# EAGLE board InkTime_PCB (EAGLE 9.7.0)
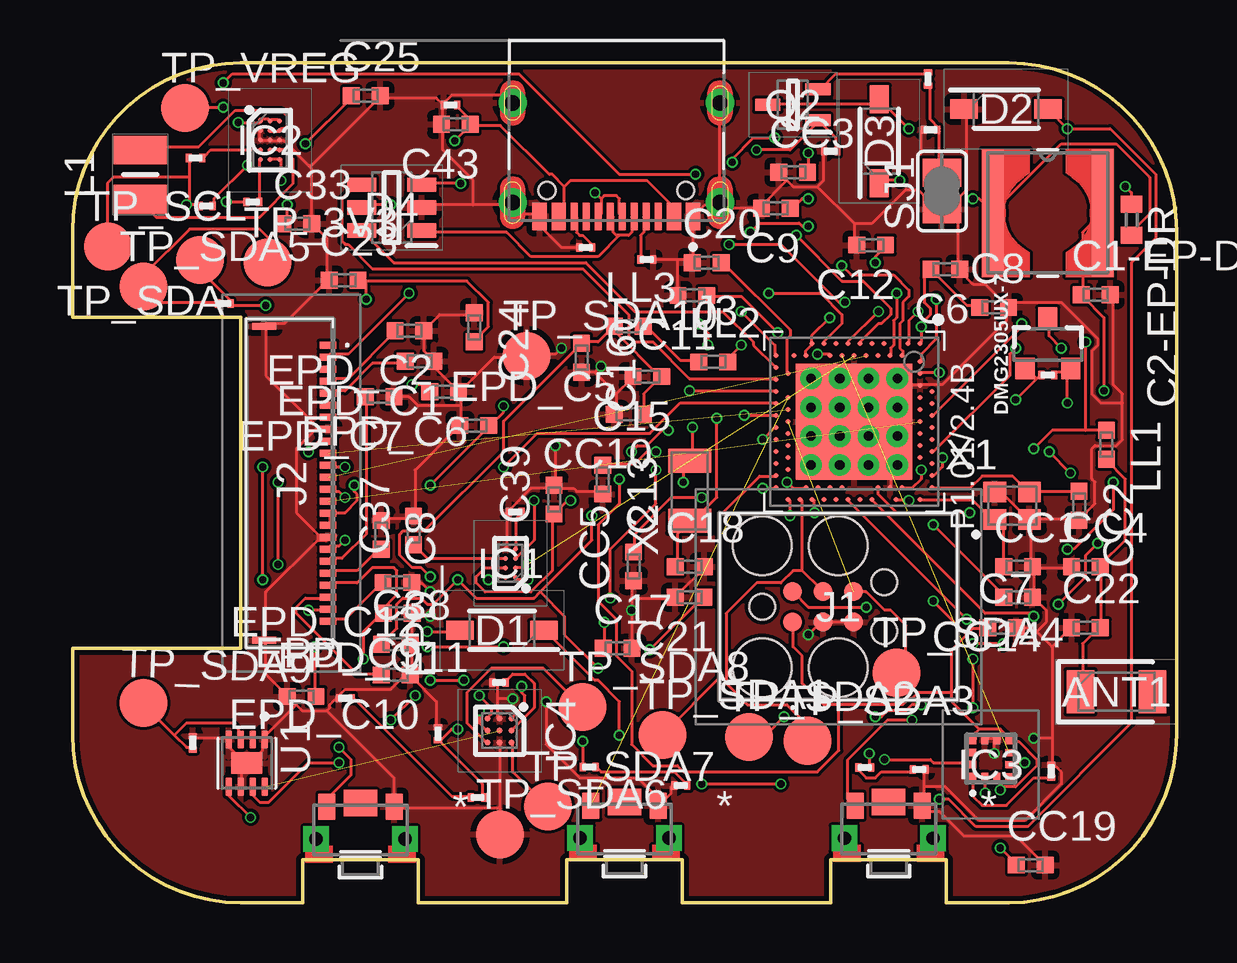
[diagram p0: board, top side]
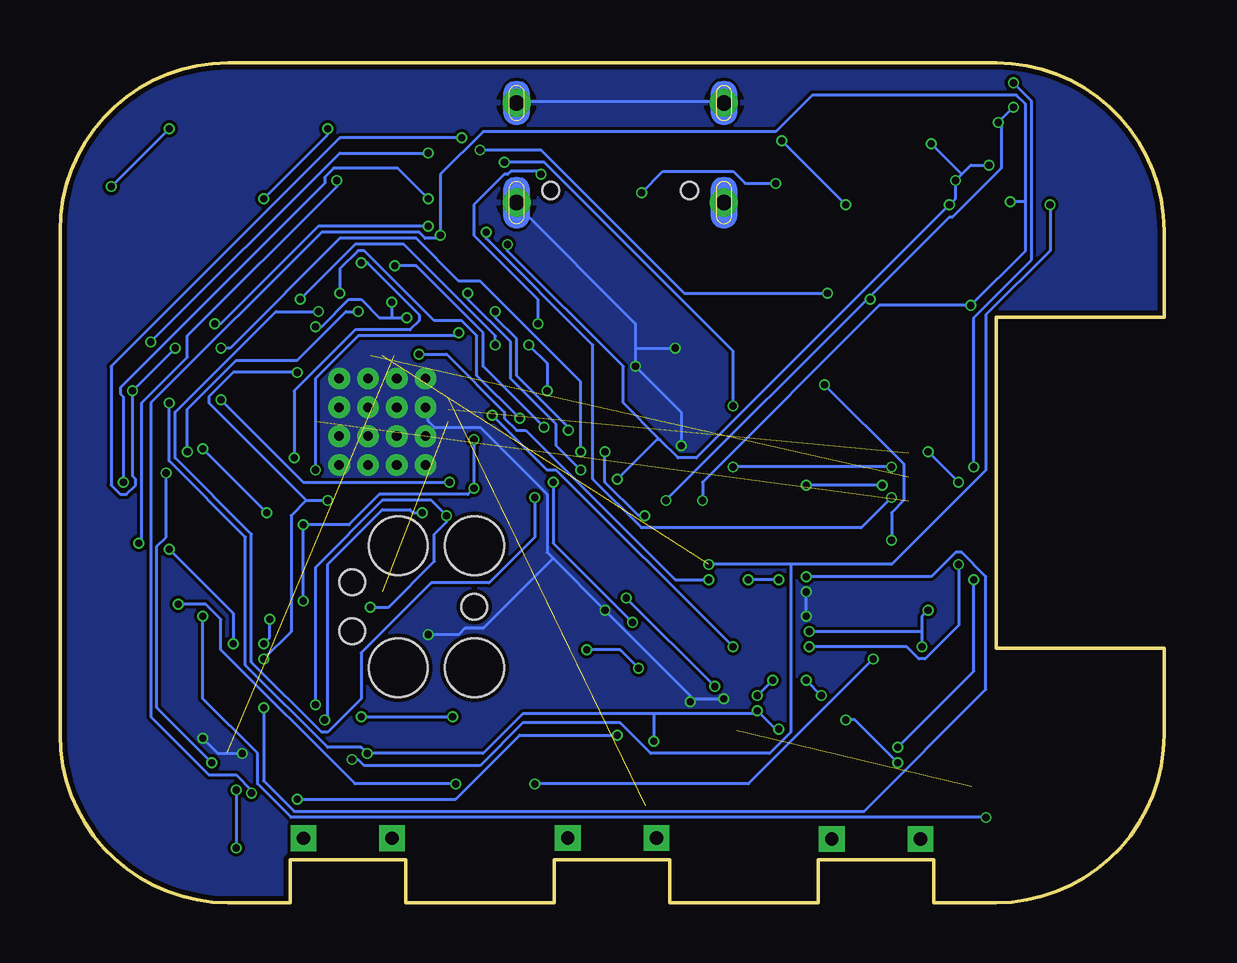
[diagram p1: board, bottom side, seen from below]

Size 46 x 35 mm. Coordinates in mm from the lower left corner, seen from the top.
Outline: 39,0 36.4,0 36.4,1.8 31.6,1.8 31.6,0 25.4,0 25.4,1.8 20.6,1.8 20.6,0 14.4,0 14.4,1.8 9.6,1.8 9.6,0 7,0 arc-90 0,7 0,10.6 7,10.6 7,24.4 0,24.4 0,28 arc-90 7,35 39,35 arc-90 46,28 46,7 arc-90 39,0
Copper layers (1*16): Top 0.035mm / dielectric 1.6mm / Bottom 0.035mm
Design rules "jlcpcb-2layers.dru": minimum track width 5mil, minimum drill 0.3mm, track to track 5mil, track to pad 5mil, pad to pad 5mil, via to via 5mil, smd to smd 5mil, copper to edge 0.2mm, drill to drill 6mil, minimum pad ring 10mil, minimum via ring 3mil, stop-mask expansion 4mil, vias tented up to drill 0mil, thermal gap 10mil

## Footprints (pad centres in the part's own frame; a part is rotated, then mirrored left to right if it is on the bottom)
2450AT18B100E_ANTC3216X140N = smd 1.15 x 1.8: 1 -1.5,0; 2 1.5,0
NORDIC_NRF_3_RESC0402_M = smd 0.7 x 0.7: 1 -0.6,0; 2 0.6,0
GRM011R60J152KE01L_1_0201 = smd 0.35 x 0.25: 1 0,0.275; 2 0,-0.275
ESP32_C6_LIBRARY_1_ESP32_WROVER_EAGLE-LTSPICE_C0402 = smd 0.7 x 0.9: 1 -0.65,0; 2 0.65,0
ESP32_C6_LIBRARY_5_SOD3716X135N = smd 1.15 x 0.8: 1 -1.75,0; 2 1.75,0
ESP32_C6_LIBRARY_3_SOT95P280X145-6N = smd 1.2 x 0.6: 1 -1.25,0.95; 2 -1.25,0; 3 -1.25,-0.95; 4 1.25,-0.95; 5 1.25,0; 6 1.25,0.95
ESP32_C6_LIBRARY_4_ESP32_C6_LIBRARY_4_ESP32_C6_LIBRARY_4_ESP32_C6_LIBRARY_4_ESP32_WROVER_SPARKFUN-DISCRETESEMI_SOT23-3 = smd 0.8 x 0.9: 1 -0.95,-1; 2 0.95,-1; 3 0,1.1
BQ25180YBGR_BGA8C40P2X4_100X155X50 = smd 0.2 x 0.2: A1 -0.2,0.6; A2 0.2,0.6; B1 -0.2,0.2; B2 0.2,0.2; C1 -0.2,-0.2; C2 0.2,-0.2; D1 -0.2,-0.6; D2 0.2,-0.6
RT6160AWSC_BGA15C40P3X5_140X230X60 = smd 0.216 x 0.216: A1 -0.4,0.8; A2 0,0.8; A3 0.4,0.8; B1 -0.4,0.4; B2 0,0.4; B3 0.4,0.4; C1 -0.4,0; C2 0,0; C3 0.4,0; D1 -0.4,-0.4; D2 0,-0.4; D3 0.4,-0.4; E1 -0.4,-0.8; E2 0,-0.8; E3 0.4,-0.8
BMA423_BMA423 = smd 0.3 x 0.35: 1 -0.75,-0.775; 2 -0.25,-0.775; 3 0.25,-0.775; 4 0.75,-0.775; 7 0.75,0.775; 8 0.25,0.775; 9 -0.25,0.775; 10 -0.75,0.775 | smd 0.35 x 0.3: 5 0.775,-0.25; 6 0.775,0.25; 11 -0.775,0.25; 12 -0.775,-0.25
DRV2605YZFR_BGA9C50P3X3_144X144X62 = smd 0.25 x 0.25: A1 -0.5,0.5; A2 0,0.5; A3 0.5,0.5; B1 -0.5,0; B2 0,0; B3 0.5,0; C1 -0.5,-0.5; C2 0,-0.5; C3 0.5,-0.5
TC2030-IDC_TC2030IDC = smd 0.783 x 0.783: 1 -0.953,-0.635; 2 -0.953,0.635; 3 0.317,-0.635; 4 0.317,0.635; 5 1.588,-0.635; 6 1.588,0.635 | hole 2.451: -2.223,-2.54; -2.223,2.54; 0.952,-2.54; 0.952,2.54 | hole 1.067: -2.223,0; 2.857,-1.016; 2.857,1.016
503480-2400_5034802400 = smd 0.3 x 0.7: 1 -5.75,1.525; 2 -5.25,1.525; 3 -4.75,1.525; 4 -4.25,1.525; 5 -3.75,1.525; 6 -3.25,1.525; 7 -2.75,1.525; 8 -2.25,1.525; 9 -1.75,1.525; 10 -1.25,1.525; 11 -0.75,1.525; 12 -0.25,1.525; 13 0.25,1.525; 14 0.75,1.525; 15 1.25,1.525; 16 1.75,1.525; 17 2.25,1.525; 18 2.75,1.525; 19 3.25,1.525; 20 3.75,1.525; 21 4.25,1.525; 22 4.75,1.525; 23 5.25,1.525; 24 5.75,1.525 | smd 0.3 x 1: MP1 -6.54,-1.125; MP2 6.54,-1.125
KH-TYPE-C-16P_KINGHELM_KH-TYPE-C-16P = smd 0.6 x 1.15: A1_B12 -3.2,4.725; A4_B9 -2.4,4.725; A9_B4 2.4,4.725; A12_B1 3.2,4.725 | smd 0.3 x 1.15: A5 -1.25,4.725; A6 -0.25,4.725; A7 0.25,4.725; A8 1.25,4.725; B5 1.75,4.725; B6 0.75,4.725; B7 -0.75,4.725; B8 -1.75,4.725 | drill 0.65 pad 1.05: SH1 -4.32,0; SH2 4.32,0; SH3 -4.32,4.15; SH4 4.32,4.15 | hole 0.7: -2.89,3.65; 2.89,3.65
MLP2016SR47MT0S1_INDC2016X100N = smd 1.2 x 2.2: 1 -1.028,0; 2 1.028,0
ESP32_C6_LIBRARY_2_IND_4828-WE-TPC_WRE = smd 0.9 x 5.3: 1 -2.286,0; 2 2.286,0
NORDIC_NRF_2_RESC0402_M = smd 0.7 x 0.7: 1 -0.6,0; 2 0.6,0
NORDIC_NRF_4_AQFN50P700X700X85_HS-74N = smd 4.85 x 4.85: P$74 0,0 | drill 0.4 pad 0.6: P$75 -1.8,1.8; P$76 -0.6,1.8; P$77 0.6,1.8; P$78 1.8,1.8; P$79 -1.8,0.6; P$80 -0.6,0.6; P$81 0.6,0.6; P$82 1.8,0.6; P$83 -1.8,-0.6; P$84 -0.6,-0.6; P$85 0.6,-0.6; P$86 1.8,-0.6; P$87 -1.8,-1.8; P$88 -0.6,-1.8; P$89 0.6,-1.8; P$90 1.8,-1.8 | smd 0.2 x 0.2: P$A8 -1.25,3.25; P$A10 -0.75,3.25; P$A12 -0.25,3.25; P$A14 0.25,3.25; P$A16 0.75,3.25; P$A18 1.25,3.25; P$A20 1.75,3.25; P$A22 2.25,3.25; P$A23 2.75,3.25; P$AA24 3.25,-2.25; P$AB2 -2.75,-2.5; P$AC5 -2,-2.75; P$AC9 -1,-2.75; P$AC11 -0.5,-2.75; P$AC13 0,-2.75; P$AC15 0.5,-2.75; P$AC17 1,-2.75; P$AC19 1.5,-2.75; P$AC21 2,-2.75; P$AC24 3.25,-2.75; P$AD2 -2.75,-3.25; P$AD4 -2.25,-3.25; P$AD6 -1.75,-3.25; P$AD8 -1.25,-3.25; P$AD10 -0.75,-3.25; P$AD12 -0.25,-3.25; P$AD14 0.25,-3.25; P$AD16 0.75,-3.25; P$AD18 1.25,-3.25; P$AD20 1.75,-3.25; P$AD22 2.25,-3.25; P$AD23 2.75,-3.25; P$B1 -3.25,2.75; P$B3 -2.5,2.75; P$B5 -2,2.75; P$B7 -1.5,2.75; P$B9 -1,2.75; P$B11 -0.5,2.75; P$B13 0,2.75; P$B15 0.5,2.75; P$B17 1,2.75; P$B19 1.5,2.75; P$B24 3.25,2.75; P$C1 -3.25,2.25; P$D2 -2.75,2; P$D23 2.75,2; P$E24 3.25,1.75; P$F2 -2.75,1.5; P$F23 2.75,1.5; P$G1 -3.25,1.25; P$H2 -2.75,1; P$H23 2.75,1; P$J1 -3.25,0.75; P$J24 3.25,0.75; P$K2 -2.75,0.5; P$L1 -3.25,0.25; P$L24 3.25,0.25; P$M2 -2.75,0; P$N1 -3.25,-0.25; P$N24 3.25,-0.25; P$P2 -2.75,-0.5; P$P23 2.75,-0.5; P$R1 -3.25,-0.75; P$R24 3.25,-0.75; P$T2 -2.75,-1; P$T23 2.75,-1; P$U1 -3.25,-1.25; P$U24 3.25,-1.25; P$V23 2.75,-1.5; P$W1 -3.25,-1.75; P$W24 3.25,-1.75; P$Y2 -2.75,-2; P$Y23 2.75,-2
ESP32_C6_LIBRARY_6_SOT65P210X110-3N = smd 1.05 x 0.5: 1 -1.05,0.65; 2 -1.05,-0.65; 3 1.05,0
CPF0201D7K68C1_0201 = smd 0.35 x 0.25: 1 0,0.275; 2 0,-0.275
ESP32_C6_LIBRARY_7_JUMPER_SJ = smd 1.168 x 1.6: 1 -0.762,0; 2 0.762,0
2025-10-22_07-23-44_LIBRARY_SW_EVP-AKE31A_PAN = smd 0.711 x 1.092: 1 -1.4,-0.972; 2 1.4,-0.972 | drill 0.559 pad 0.914 square: 3 -1.848,0.381; 4 1.848,0.381 | smd 1.397 x 1.092: 5 0,-1.124
HECTOR_WATCH_1_TP20R = smd 2 x 2: TP 0,0
ESP32_C6_LIBRARY_SON50P200X200X80-9N = smd 0.76 x 0.27: 1 -0.985,0.75; 2 -0.985,0.25; 3 -0.985,-0.25; 4 -0.985,-0.75; 5 0.985,-0.75; 6 0.985,-0.25; 7 0.985,0.25; 8 0.985,0.75 | smd 0.9 x 1.3: 9 0,0
NORDIC_NRF_BT-XTAL_2016_N = smd 0.95 x 0.85: 1 -0.725,-0.575; 2 0.725,-0.575; 3 0.725,0.575; 4 -0.725,0.575
NORDIC_NRF_1_XTAL_3215_N = smd 1 x 1.8: 1 -1.25,0; 2 1.25,0

## Placement (x,y rotation side)
ANT1  2450AT18B100E_2450AT18B100E  [2450AT18B100E_ANTC3216X140N]  43.5,8.79 0 top
C1-EP-DR  10uF  [NORDIC_NRF_3_RESC0402_M]  42.63,25.34 0 top
C2  GRM011R60J152KE01L_1_GRM011R60J152KE01L  [GRM011R60J152KE01L_1_0201]  5.01,6.66 0 top
C2-EP-DR  4.7uF/25V  [ESP32_C6_LIBRARY_1_ESP32_WROVER_EAGLE-LTSPICE_C0402]  44.13,28.46 270 top
C3  1uF  [GRM011R60J152KE01L_1_0201]  17.77,9.18 90 top
C4  0.1uF  [GRM011R60J152KE01L_1_0201]  15.23,7.04 0 top
C5  GRM011R60J152KE01L_1_GRM011R60J152KE01L  [GRM011R60J152KE01L_1_0201]  11.37,8.52 90 top
C6  4.7uF  [NORDIC_NRF_3_RESC0402_M]  36.37,26.4 180 top
C7  100nF  [NORDIC_NRF_3_RESC0402_M]  38.73,11.47 0 top
C8  100nF  [NORDIC_NRF_3_RESC0402_M]  38.4,24.81 0 top
C9  820pF  [NORDIC_NRF_3_RESC0402_M]  29.31,28.94 180 top
C10  GRM011R60J152KE01L_1_GRM011R60J152KE01L  [GRM011R60J152KE01L_1_0201]  35.28,5.55 270 top
C11  GRM011R60J152KE01L_1_GRM011R60J152KE01L  [GRM011R60J152KE01L_1_0201]  25.34,4.89 90 top
C12  100pF  [NORDIC_NRF_3_RESC0402_M]  33.28,27.41 180 top
C13  N.C  [NORDIC_NRF_3_RESC0402_M]  22.09,17.63 270 top
C15  1uF  [NORDIC_NRF_3_RESC0402_M]  23.95,21.93 180 top
C16  47nF  [NORDIC_NRF_3_RESC0402_M]  21.21,22.71 270 top
C17  12pF  [NORDIC_NRF_3_RESC0402_M]  22.71,10.61 0 top
C18  12pF  [NORDIC_NRF_3_RESC0402_M]  25.72,14.01 0 top
C20  4.7uF  [NORDIC_NRF_3_RESC0402_M]  26.43,26.68 0 top
C21  4.7uF  [NORDIC_NRF_3_RESC0402_M]  25.71,12.74 180 top
C22  N.C  [NORDIC_NRF_3_RESC0402_M]  42.23,11.47 0 top
C23  0.1uF  [NORDIC_NRF_3_RESC0402_M]  11.3,25.95 0 top
C24  10uF  [NORDIC_NRF_3_RESC0402_M]  16.74,23.98 270 top
C25  22uF  [NORDIC_NRF_3_RESC0402_M]  12.22,33.63 0 top
C33  22uF  [NORDIC_NRF_3_RESC0402_M]  9.36,28.3 0 top
C37  1uF  [NORDIC_NRF_3_RESC0402_M]  14.21,15.52 90 top
C38  1uF  [NORDIC_NRF_3_RESC0402_M]  13.48,10.78 0 top
C39  10uF  [NORDIC_NRF_3_RESC0402_M]  20.06,16.8 90 top
C42  GRM011R60J152KE01L_1_GRM011R60J152KE01L  [GRM011R60J152KE01L_1_0201]  15.75,33.25 90 top
C43  4.7uF  [NORDIC_NRF_3_RESC0402_M]  15.97,32.44 180 top
CC1  12pF  [NORDIC_NRF_3_RESC0402_M]  39.4,14.01 0 top
CC2  12pF  [NORDIC_NRF_3_RESC0402_M]  41.94,16.55 270 top
CC3  1pF  [NORDIC_NRF_3_RESC0402_M]  30.03,30.45 0 top
CC4  1pF  [NORDIC_NRF_3_RESC0402_M]  42.23,14.01 0 top
CC5  100nF  [NORDIC_NRF_3_RESC0402_M]  23.38,14.02 90 top
CC10  N.C  [NORDIC_NRF_3_RESC0402_M]  23.18,20.36 180 top
CC11  100pF  [NORDIC_NRF_3_RESC0402_M]  25.83,25.31 180 top
CC14  4.7uF  [NORDIC_NRF_3_RESC0402_M]  39.4,12.74 180 top
CC19  100nF  [NORDIC_NRF_3_RESC0402_M]  39.93,1.57 0 top
D1  ESP32_C6_LIBRARY_5_MBR0530  [ESP32_C6_LIBRARY_5_SOD3716X135N]  17.89,11.35 180 top
D2  ESP32_C6_LIBRARY_5_MBR0530  [ESP32_C6_LIBRARY_5_SOD3716X135N]  38.9,33.08 0 top
D3  ESP32_C6_LIBRARY_5_MBR0530  [ESP32_C6_LIBRARY_5_SOD3716X135N]  33.62,31.73 90 top
D4  ESP32_C6_LIBRARY_3_USBLC6-2SC6Y  [ESP32_C6_LIBRARY_3_SOT95P280X145-6N]  13.29,28.97 180 top
DMG2305UX-7  20V/4.2A/52mΩ/1.4W  [ESP32_C6_LIBRARY_4_ESP32_C6_LIBRARY_4_ESP32_C6_LIBRARY_4_ESP32_C6_LIBRARY_4_ESP32_WROVER_SPARKFUN-DISCRETESEMI_SOT23-3]  40.64,23.27 0 top
EPD_C1  1uF/50V  [NORDIC_NRF_3_RESC0402_M]  14.46,22.57 180 top
EPD_C2  1uF/50V  [NORDIC_NRF_3_RESC0402_M]  14.04,23.84 180 top
EPD_C5  0.1uF/50V  [NORDIC_NRF_3_RESC0402_M]  16.74,19.89 0 top
EPD_C6  1uF/50V  [NORDIC_NRF_3_RESC0402_M]  15.48,21.3 180 top
EPD_C7  1uF/50V  [NORDIC_NRF_3_RESC0402_M]  12.79,21.09 180 top
EPD_C8  1uF/50V  [NORDIC_NRF_3_RESC0402_M]  12.86,15.33 270 top
EPD_C9  1uF/50V  [NORDIC_NRF_3_RESC0402_M]  13.55,12.07 180 top
EPD_C10  1uF/50V  [NORDIC_NRF_3_RESC0402_M]  13.47,9.49 180 top
EPD_C11  1uF/50V  [NORDIC_NRF_3_RESC0402_M]  9.54,8.6 0 top
EPD_C12  1uF/50V  [NORDIC_NRF_3_RESC0402_M]  13.54,13.35 180 top
IC1  BQ25180YBGR_BQ25180YBGR  [BQ25180YBGR_BGA8C40P2X4_100X155X50]  18.25,14.15 180 top
IC2  RT6160AWSC_RT6160AWSC  [RT6160AWSC_BGA15C40P3X5_140X230X60]  8.22,31.78 0 top
IC3  BMA423_BMA423  [BMA423_BMA423]  38.26,6.01 359.8 top
IC4  DRV2605YZFR_DRV2605YZFR  [DRV2605YZFR_BGA9C50P3X3_144X144X62]  17.8,7.17 270 top
J1  TC2030-IDC_TC2030-IDC  [TC2030-IDC_TC2030IDC]  30.96,12.34 0 top
J2  503480-2400_503480-2400  [503480-2400_5034802400]  9.12,17.49 270 top
J3  KH-TYPE-C-16P_KH-TYPE-C-16P  [KH-TYPE-C-16P_KINGHELM_KH-TYPE-C-16P]  22.66,33.33 180 top
L1  MLP2016SR47MT0S1_FTC252012SR47MBCA  [MLP2016SR47MT0S1_INDC2016X100N]  2.82,30.34 270 top
L5  ESP32_C6_LIBRARY_2_744043680IND_4828-WE-TPC_WRE  [ESP32_C6_LIBRARY_2_IND_4828-WE-TPC_WRE]  40.64,28.75 0 top
LL1  3.9nH  [NORDIC_NRF_2_RESC0402_M]  43.08,19.09 270 top
LL2  10uH  [NORDIC_NRF_2_RESC0402_M]  26.7,22.54 0 top
LL3  15uH  [NORDIC_NRF_2_RESC0402_M]  23.18,24.02 0 top
P1.01/2.4B  NORDIC_NRF_4_NRF52840_QF  [NORDIC_NRF_4_AQFN50P700X700X85_HS-74N]  32.57,20.05 270 top
Q2  ESP32_C6_LIBRARY_6_SI1308EDL-T1-GE3  [ESP32_C6_LIBRARY_6_SOT65P210X110-3N]  30.01,33.25 180 top
R1_EP_DR  CPF0201D7K68C1_CPF0201D7K68C1  [CPF0201D7K68C1_0201]  35.65,34.32 180 top
R2  CPF0201D7K68C1_CPF0201D7K68C1  [CPF0201D7K68C1_0201]  5.12,31.04 90 top
R2_EP_DR  CPF0201D7K68C1_CPF0201D7K68C1  [CPF0201D7K68C1_0201]  31.59,31.32 90 top
R3  CPF0201D7K68C1_CPF0201D7K68C1  [CPF0201D7K68C1_0201]  7.51,29.2 90 top
R4  CPF0201D7K68C1_CPF0201D7K68C1  [CPF0201D7K68C1_0201]  5.58,29.04 90 top
R5  CPF0201D7K68C1_CPF0201D7K68C1  [CPF0201D7K68C1_0201]  6.32,24.97 270 top
R8  CPF0201D7K68C1_CPF0201D7K68C1  [CPF0201D7K68C1_0201]  40.78,5.48 180 top
R9  10K  [CPF0201D7K68C1_0201]  18.45,16.29 90 top
R11  CPF0201D7K68C1_CPF0201D7K68C1  [CPF0201D7K68C1_0201]  16.88,4.38 90 top
R12  CPF0201D7K68C1_CPF0201D7K68C1  [CPF0201D7K68C1_0201]  33.01,5.64 90 top
R13  CPF0201D7K68C1_CPF0201D7K68C1  [CPF0201D7K68C1_0201]  21.53,5.65 270 top
R14  CPF0201D7K68C1_CPF0201D7K68C1  [CPF0201D7K68C1_0201]  23.93,26.8 90 top
R15  CPF0201D7K68C1_CPF0201D7K68C1  [CPF0201D7K68C1_0201]  21.39,27.31 90 top
R_PWR_EPD  CPF0201D7K68C1_CPF0201D7K68C1  [CPF0201D7K68C1_0201]  40.64,22 90 top
R_TYPE_SEL  CPF0201D7K68C1_CPF0201D7K68C1  [CPF0201D7K68C1_0201]  35.75,32.21 90 top
SJ1  0  [ESP32_C6_LIBRARY_7_JUMPER_SJ]  36.22,29.66 90 top
SW1  2025-10-22_07-23-44_LIBRARY_EVP-AKE31ASW_EVP-AKE31A_PAN  [2025-10-22_07-23-44_LIBRARY_SW_EVP-AKE31A_PAN]  12,3.03 180 top
SW2  2025-10-22_07-23-44_LIBRARY_EVP-AKE31ASW_EVP-AKE31A_PAN  [2025-10-22_07-23-44_LIBRARY_SW_EVP-AKE31A_PAN]  23,3.08 180 top
SW3  2025-10-22_07-23-44_LIBRARY_EVP-AKE31ASW_EVP-AKE31A_PAN  [2025-10-22_07-23-44_LIBRARY_SW_EVP-AKE31A_PAN]  34.01,3.07 180 top
TP_3V3  HECTOR_WATCH_1_TPTP20R  [HECTOR_WATCH_1_TP20R]  8.12,26.68 0 top
TP_SCL  HECTOR_WATCH_1_TPTP20R  [HECTOR_WATCH_1_TP20R]  1.48,27.35 0 top
TP_SDA  HECTOR_WATCH_1_TPTP20R  [HECTOR_WATCH_1_TP20R]  5.31,26.78 180 top
TP_SDA1  HECTOR_WATCH_1_TPTP20R  [HECTOR_WATCH_1_TP20R]  24.59,7 0 top
TP_SDA2  HECTOR_WATCH_1_TPTP20R  [HECTOR_WATCH_1_TP20R]  28.19,6.92 0 top
TP_SDA3  HECTOR_WATCH_1_TPTP20R  [HECTOR_WATCH_1_TP20R]  30.62,6.75 0 top
TP_SDA4  HECTOR_WATCH_1_TPTP20R  [HECTOR_WATCH_1_TP20R]  34.33,9.59 0 top
TP_SDA5  HECTOR_WATCH_1_TPTP20R  [HECTOR_WATCH_1_TP20R]  2.96,25.68 0 top
TP_SDA6  HECTOR_WATCH_1_TPTP20R  [HECTOR_WATCH_1_TP20R]  17.8,2.85 0 top
TP_SDA7  HECTOR_WATCH_1_TPTP20R  [HECTOR_WATCH_1_TP20R]  19.81,4.01 0 top
TP_SDA8  HECTOR_WATCH_1_TPTP20R  [HECTOR_WATCH_1_TP20R]  21.24,8.17 0 top
TP_SDA9  HECTOR_WATCH_1_TPTP20R  [HECTOR_WATCH_1_TP20R]  2.96,8.33 358.1 top
TP_SDA10  HECTOR_WATCH_1_TPTP20R  [HECTOR_WATCH_1_TP20R]  18.92,22.79 0 top
TP_VREG  HECTOR_WATCH_1_TPTP20R  [HECTOR_WATCH_1_TP20R]  4.69,33.12 0 top
U1  ESP32_C6_LIBRARY_MAX17048G+T10  [ESP32_C6_LIBRARY_SON50P200X200X80-9N]  7.26,5.82 270 top
X1  32MHz  [NORDIC_NRF_BT-XTAL_2016_N]  39.15,16.55 0 top
X2  32.768KHz  [NORDIC_NRF_1_XTAL_3215_N]  25.72,17.17 90 top

## Library data of the parts
ANT1 = InkTime_v5; ARROW_PART_NUMBER: 2450AT18B100E; ARROW_PRICE-STOCK: https://www.arrow.com/en/products/2450at18b100e/johanson-dielectrics?utm_currency=USD&region=nac; DESCRIPTION: Antennas 2.45GHz ANTENNA; HEIGHT: 1.4mm; MANUFACTURER_NAME: JOHANSON TECHNOLOGY; MANUFACTURER_PART_NUMBER: 2450AT18B100E; MOUSER_PART_NUMBER: 609-2450AT18B100E; MOUSER_PRICE-STOCK: https://www.mouser.co.uk/ProductDetail/Johanson-Technology/2450AT18B100E?qs=yCnrNFeXz%252Bh5MFsFIXGZGA%3D%3D
C1-EP-DR C2-C13 C15-C18 C20-C25 C33 C37-C39 C42 C43 CC1-CC5 CC10 CC11 CC14 CC19 EPD_C1 EPD_C2 EPD_C5-EPD_C12 LL1-LL3 P1.01/2.4B R1_EP_DR R2 R2_EP_DR R3-R5 R8 R9 R11-R15 R_PWR_EPD R_TYPE_SEL SJ1 TP_3V3 TP_SCL TP_SDA TP_SDA1-TP_SDA10 TP_VREG X1 X2 = InkTime_v5
C2-EP-DR = InkTime_v5; SPICEMODEL: NONE; SPICEPREFIX: C
D1-D3 = InkTime_v5; AVAILABILITY: In Stock; CHECK_PRICES: https://www.snapeda.com/parts/MBR0530/Onsemi/view-part/?ref=eda; DESCRIPTION: Diode Schottky 30 V 500mA Surface Mount SOD-123; MF: ON Semiconductor; MP: MBR0530; PACKAGE: SOD-123-2 ON Semiconductor; PRICE: None; PURCHASE-URL: https://www.snapeda.com/api/url_track_click_mouser/?unipart_id=179458&manufacturer=ON Semiconductor&part_name=MBR0530&search_term=None; SNAPEDA_LINK: https://www.snapeda.com/parts/MBR0530/Onsemi/view-part/?ref=snap
D4 = InkTime_v5; AVAILABILITY: In Stock; CHECK_PRICES: https://www.snapeda.com/parts/USBLC6-2SC6Y/STMicroelectronics/view-part/?ref=eda; DESCRIPTION: 17V Clamp 5A (8/20µs) Ipp Tvs Diode Surface Mount SOT-23-6; MF: STMicroelectronics; MP: USBLC6-2SC6Y; PACKAGE: SOT-23-6 STMicroelectronics; PRICE: None; SNAPEDA_LINK: https://www.snapeda.com/parts/USBLC6-2SC6Y/STMicroelectronics/view-part/?ref=snap
DMG2305UX-7 = InkTime_v5; PROD_ID: TRAN-14388
IC1 = InkTime_v5; ARROW_PART_NUMBER: BQ25180YBGR; ARROW_PRICE-STOCK: https://www.arrow.com/en/products/bq25180ybgr/texas-instruments?utm_currency=USD&region=nac; DESCRIPTION: Charger IC Lithium Ion/Polymer, Lithium Iron Phosphate 8-DSBGA (1.6x1.1); HEIGHT: 0.5mm; MANUFACTURER_NAME: Texas Instruments; MANUFACTURER_PART_NUMBER: BQ25180YBGR; MOUSER_PART_NUMBER: 595-BQ25180YBGR; MOUSER_PRICE-STOCK: https://www.mouser.co.uk/ProductDetail/Texas-Instruments/BQ25180YBGR?qs=doiCPypUmgEWjAK%252BJAX6Tw%3D%3D
IC2 = InkTime_v5; DESCRIPTION: Buck-Boost Regulator Positive Output Step-Up/Step-Down I2C DC-DC Controller IC 15-WL-CSP (BSC) (1.4x2.3); HEIGHT: 0.6mm; MANUFACTURER_NAME: RICHTEK; MANUFACTURER_PART_NUMBER: RT6160AWSC; MOUSER_PART_NUMBER: 835-RT6160AWSC; MOUSER_PRICE-STOCK: https://www.mouser.co.uk/ProductDetail/Richtek/RT6160AWSC?qs=amGC7iS6iy%2FLd9PSoixZXQ%3D%3D
IC3 = InkTime_v5; ARROW_PART_NUMBER: BMA423; ARROW_PRICE-STOCK: https://www.arrow.com/en/products/bma423/bosch; DESCRIPTION: Accelerometers Triaxial low-g 12bit Acceleration Sensor; HEIGHT: 1mm; MANUFACTURER_NAME: BOSCH; MANUFACTURER_PART_NUMBER: BMA423; MOUSER_PART_NUMBER: 262-BMA423; MOUSER_PRICE-STOCK: https://www.mouser.co.uk/ProductDetail/Bosch-Sensortec/BMA423?qs=HXFqYaX1Q2xC%252BSgeGoX3mg%3D%3D
IC4 = InkTime_v5; ARROW_PART_NUMBER: DRV2605YZFR; ARROW_PRICE-STOCK: https://www.arrow.com/en/products/drv2605yzfr/texas-instruments?region=nac; DESCRIPTION: Haptic Driver for ERM/LRA with Built-In Library and Smart Loop Architecture; HEIGHT: 0.625mm; MANUFACTURER_NAME: Texas Instruments; MANUFACTURER_PART_NUMBER: DRV2605YZFR
J1 = InkTime_v5; DESCRIPTION: CABLE ADAPTER 6 POS; HEIGHT: 19mm; MANUFACTURER_NAME: Tag Connect; MANUFACTURER_PART_NUMBER: TC2030-IDC
J2 = InkTime_v5; DESCRIPTION: FFC & FPC Connectors 0.5mm FPC RA SMT Dual Contact 24Ckt; HEIGHT: 1.87mm; MANUFACTURER_NAME: Molex; MANUFACTURER_PART_NUMBER: 503480-2400; MOUSER_PART_NUMBER: 538-503480-2400; MOUSER_PRICE-STOCK: https://www.mouser.co.uk/ProductDetail/Molex/503480-2400?qs=OAhjpuo3Vu7efIoxFh9AOw%3D%3D
J3 = InkTime_v5; AVAILABILITY: Not in stock; CHECK_PRICES: https://www.snapeda.com/parts/KH-TYPE-C-16P/Kinghelm/view-part/?ref=eda; MF: kinghelm; MP: KH-TYPE-C-16P; PACKAGE: None; PRICE: None; SNAPEDA_LINK: https://www.snapeda.com/parts/KH-TYPE-C-16P/Kinghelm/view-part/?ref=snap
L1 = InkTime_v5; DESCRIPTION: SMD / SMT Inductors (Coils), L=0.47?H, L x W x T :; HEIGHT: 1mm; JLCPCB: https://jlcpcb.com/partdetail/6763488-FTC252012SR47MBCA/C5832368; MANUFACTURER_NAME: TDK; MANUFACTURER_PART_NUMBER: FTC252012SR47MBCA
L5 = InkTime_v5; COPYRIGHT: Copyright (C) 2024 Ultra Librarian. All rights reserved.; MANUFACTURER_PART_NUMBER: 744043680; MFR_NAME: Wurth Electronics
Q2 = InkTime_v5; AVAILABILITY: In Stock; CHECK_PRICES: https://www.snapeda.com/parts/SI1308EDL-T1-GE3/Vishay+Siliconix/view-part/?ref=eda; DESCRIPTION: Si1308EDL-T1-GE3 N-channel MOSFET Transistor, 1.5 A, 30 V, 3-Pin SC-70 | Siliconix / Vishay SI1308EDL-T1-GE3; MF: Vishay Siliconix; MP: SI1308EDL-T1-GE3; PACKAGE: SOT-323 Vishay Semiconductor; PRICE: None; PURCHASE-URL: https://www.snapeda.com/api/url_track_click_mouser/?unipart_id=274603&manufacturer=Vishay Siliconix&part_name=SI1308EDL-T1-GE3&search_term=None; SNAPEDA_LINK: https://www.snapeda.com/parts/SI1308EDL-T1-GE3/Vishay+Siliconix/view-part/?ref=snap
SW1-SW3 = InkTime_v5; COPYRIGHT: Copyright (C) 2025 Ultra Librarian. All rights reserved.; DIGI-KEY_PART_NUMBER_1: P123437TR-ND; DIGI-KEY_PART_NUMBER_2: P123437CT-ND; DIGI-KEY_PART_NUMBER_3: P123437DKR-ND; MANUFACTURER_NAME: Panasonic; MANUFACTURER_PART_NUMBER: EVP-AKE31A
U1 = InkTime_v5; AVAILABILITY: In Stock; CHECK_PRICES: https://www.snapeda.com/parts/MAX17048G+T10/Analog+Devices/view-part/?ref=eda; DESCRIPTION: 3µA 1-Cell/2-Cell Fuel Gauge with ModelGauge; MF: Analog Devices; MP: MAX17048G+T10; PACKAGE: TDFN-8 Maxim; PRICE: None; PURCHASE-URL: https://www.snapeda.com/api/url_track_click_mouser/?unipart_id=329239&manufacturer=Analog Devices&part_name=MAX17048G+T10&search_term=None; SNAPEDA_LINK: https://www.snapeda.com/parts/MAX17048G+T10/Analog+Devices/view-part/?ref=snap

## Nets
3V3/1.7D: C4.2 DMG2305UX-7.2 IC4.C2 R11.2 R12.2 R13.2 R_PWR_EPD.2
3V3/2.4A: C6.2 C7.1 C8.1 C25.1 C33.1 CC14.2 CC19.1 IC2.E2 IC2.E3 IC3.3 IC3.7 IC3.10 J1.1 P1.01/2.4B.P$AD14 P1.01/2.4B.P$AD23 P1.01/2.4B.P$B1 P1.01/2.4B.P$W1 P1.01/2.4B.P$Y2 R4.2 R5.2 TP_3V3.TP TP_SDA5.TP
ALERT: P1.01/2.4B.P$J24 U1.5
D+: D4.4 P1.01/2.4B.P$AD6
D-: D4.6 P1.01/2.4B.P$AD4
DN: D4.1 J3.A7 J3.B7
DP: D4.3 J3.A6 J3.B6
EPD_3V3: C1-EP-DR.1 DMG2305UX-7.3 EPD_C5.2 J2.15 J2.16 L5.2
EPD_BUSY: J2.9 P1.01/2.4B.P$AD12
EPD_CS: J2.12 P1.01/2.4B.P$K2
EPD_DC: J2.11 P1.01/2.4B.P$AD10
EPD_RST: J2.10 P1.01/2.4B.P$AC11
GDR: J2.2 Q2.1 R2_EP_DR.2
GND: C1-EP-DR.2 C2.1 C3.1 C4.1 C5.1 C6.1 C7.2 C8.2 C9.2 C10.1 C11.1 C12.2 C13.2 C15.2 C16.2 C17.2 C18.2 C20.1 C21.2 C22.1 C23.1 C24.1 C25.2 C33.2 C37.2 C38.2 C39.2 C42.1 C43.2 CC1.2 CC2.2 CC3.1 CC4.1 CC5.1 CC10.2 CC11.2 CC14.1 CC19.2 D2.1 D4.2 EPD_C1.1 EPD_C2.1 EPD_C5.1 EPD_C6.1 EPD_C7.1 EPD_C8.1 EPD_C9.1 EPD_C10.1 EPD_C11.1 EPD_C12.1 IC1.D2 IC2.B1 IC2.C1 IC2.C2 IC2.C3 IC3.8 IC3.9 IC4.B1 IC4.B3 J1.3 J1.5 J2.8 J2.17 J2.MP1 J2.MP2 J3.A1_B12 J3.A12_B1 J3.SH1 J3.SH2 J3.SH3 J3.SH4 P1.01/2.4B.P$74 P1.01/2.4B.P$75 P1.01/2.4B.P$76 P1.01/2.4B.P$77 P1.01/2.4B.P$78 P1.01/2.4B.P$79 P1.01/2.4B.P$80 P1.01/2.4B.P$81 P1.01/2.4B.P$82 P1.01/2.4B.P$83 P1.01/2.4B.P$84 P1.01/2.4B.P$85 P1.01/2.4B.P$86 P1.01/2.4B.P$87 P1.01/2.4B.P$88 P1.01/2.4B.P$89 P1.01/2.4B.P$90 P1.01/2.4B.P$B7 P1.01/2.4B.P$F23 R2_EP_DR.1 R8.2 R9.1 R14.2 R15.1 R_TYPE_SEL.1 SJ1.1 SW1.1 SW2.1 SW3.1 TP_SDA6.TP TP_SDA10.TP U1.1 U1.4 U1.6 U1.9 X1.2 X1.4
HAPTIC_EN: IC4.A1 P1.01/2.4B.P$U1
IMU_INT1: IC3.5 P1.01/2.4B.P$N1
IMU_INT2: IC3.6 P1.01/2.4B.P$P2
LX1: IC2.B2 IC2.B3 L1.1
LX2: IC2.D2 IC2.D3 L1.2
MOSI: J2.14 P1.01/2.4B.P$B13
N$1: IC1.D1 R9.2
N$2: C9.1 P1.01/2.4B.P$N24
N$3: CC3.2 LL1.1 P1.01/2.4B.P$H23
N$4: IC2.D1 R2.2
N$5: IC2.E1 R3.2
N$6: C20.2 P1.01/2.4B.P$AC5
N$7: ANT1.1 C22.2 CC4.2 LL1.2
N$8: CC1.1 P1.01/2.4B.P$B24 X1.1
N$9: CC2.1 P1.01/2.4B.P$A23 X1.3
N$10: CC11.1 P1.01/2.4B.P$D23
N$11: C18.1 P1.01/2.4B.P$F2 X2.1
N$12: C12.1 P1.01/2.4B.P$A22
N$13: C13.1 P1.01/2.4B.P$A18
N$14: LL2.1 LL3.2
N$15: LL2.2 P1.01/2.4B.P$B3
N$17: C15.1 C16.1 CC10.1 LL3.1 P1.01/2.4B.P$B5 P1.01/2.4B.P$E24
N$18: C17.1 P1.01/2.4B.P$D2 X2.2
N$19: IC3.1 R8.1
N$20: CC5.2 P1.01/2.4B.P$C1
N$21: C2-EP-DR.1 D1.1 D2.2
N$22: Q2.2 R1_EP_DR.2
N$23: R1_EP_DR.1 R_TYPE_SEL.2 SJ1.2
N$24: C2-EP-DR.2 D3.2 L5.1 Q2.3
N$25: EPD_C2.2 J2.4
N$26: EPD_C1.2 J2.5
N$27: J3.B5 R15.2
N$28: EPD_C7.2 J2.19
N$29: C5.2 R11.1
N$30: EPD_C12.2 J2.24
N$31: EPD_C6.2 J2.18
N$32: EPD_C8.2 J2.20
N$33: C10.2 R12.1
N$34: EPD_C10.2 J2.22
N$35: C11.2 R13.1
N$36: J3.A5 R14.1
N$37: C3.2 IC4.A2
OUT+: IC4.A3 TP_SDA7.TP
OUT-: IC4.C3 TP_SDA8.TP
P0.04: P1.01/2.4B.P$J1
P0.09: P1.01/2.4B.P$L24
P0.13: P1.01/2.4B.P$AD8 SW1.2
P0.14: P1.01/2.4B.P$AC9 SW2.2
P0.19: P1.01/2.4B.P$AC15
P0.20: P1.01/2.4B.P$AD16
P0.21: P1.01/2.4B.P$AC17
P0.22: P1.01/2.4B.P$AD18
P0.23: P1.01/2.4B.P$AC19
P0.24: P1.01/2.4B.P$AD20
P0.25: P1.01/2.4B.P$AC21
P0.26: P1.01/2.4B.P$G1
P0.27: P1.01/2.4B.P$H2
P0.28: P1.01/2.4B.P$B11
P0.29: P1.01/2.4B.P$A10
P0.30: P1.01/2.4B.P$B9
P0.31: P1.01/2.4B.P$A8
P1.01: DMG2305UX-7.1 P1.01/2.4B.P$Y23 R_PWR_EPD.1
P1.02: P1.01/2.4B.P$W24 SW3.2
P1.03: P1.01/2.4B.P$V23
P1.04: P1.01/2.4B.P$U24
P1.05: P1.01/2.4B.P$T23
P1.06: P1.01/2.4B.P$R24
P1.07: P1.01/2.4B.P$P23
P1.09: P1.01/2.4B.P$R1
P1.10: P1.01/2.4B.P$A20
P1.11: P1.01/2.4B.P$B19
P1.12: P1.01/2.4B.P$B17
P1.13: P1.01/2.4B.P$A16
P1.14: P1.01/2.4B.P$B15
P1.15: P1.01/2.4B.P$A14
PMIC_INT: IC1.A1 P1.01/2.4B.P$T2
PREVGH: D3.1 EPD_C9.2 J2.21
PREVGL: D1.2 EPD_C11.2 J2.23
RESE: J2.3
RESET: J1.6 P1.01/2.4B.P$AC13 TP_SDA4.TP
SCK: J2.13 P1.01/2.4B.P$A12
SCL/1.4C: IC4.C1 U1.7
SCL/2.4C: IC1.B1 IC3.12 P1.01/2.4B.P$M2 R2.1 R4.1 TP_SCL.TP
SDA/1.4C: IC4.B2 U1.8
SDA/2.4C: IC1.C1 IC3.2 P1.01/2.4B.P$L1 R3.1 R5.1 TP_SDA.TP
SWDCLK: J1.4 P1.01/2.4B.P$AA24 TP_SDA3.TP
SWDIO: J1.2 P1.01/2.4B.P$AC24 TP_SDA2.TP
SWO: P1.01/2.4B.P$AD22 TP_SDA1.TP
VBAT/1.2A: C2.2 TP_SDA9.TP U1.2 U1.3
VBAT/2.5C: C37.1 IC1.C2
VBUS/1.5D: C42.2 C43.1 D4.5 J3.A4_B9 J3.A9_B4
VBUS/2.6D: C21.1 C38.1 IC1.A2 P1.01/2.4B.P$AD2
VREG: C23.2 C24.2 C39.1 IC1.B2 IC2.A1 IC2.A2 IC2.A3 TP_VREG.TP

## Tracks (layer width: path | path; a pad name or v marks a point on that pad's centre or on a via)
3V3/1.7D  (via drill 0.3)
  Top 0.127: 41.45,22.1 40.94,22.1 R_PWR_EPD.2 | 41.45,22.1 41.58,22.23 DMG2305UX-7.2 41.45,22.1 | v16.94,8 16.94,7.49 17.2,7.24 IC4.C2 | v16.05,7.24 15.8,7.24 15.29,6.73 | 15.29,6.73 17.07,4.95 17.07,4.45 R11.2 | 15.29,6.73 C4.2 | v33.2,6.22 33.2,5.72 R12.2 | v21.26,6.73 21.26,5.72 R13.2 | v41.45,20.83 41.45,22.1
  Bottom 0.127: 16.81,7.87 16.18,7.24 v16.05,7.24 | 16.81,7.87 21.26,7.87 | 21.26,7.87 26.72,7.87 28.37,6.22 v33.2,6.22 33.45,6.48 34.85,6.48 38.28,9.91 38.28,15.24 41.45,18.42 v41.45,20.83 | 16.81,7.87 v16.94,8 | 21.26,7.87 v21.26,6.73
3V3/2.4A  (via drill 0.3)
  Top 0.127: v28.75,17.27 29.26,17.27 P1.01/2.4B.P$AD23 | v28.75,19.3 29.26,19.81 P1.01/2.4B.P$AD14 | v35.86,15.75 38.79,12.83 CC14.2 | 38.79,4.83 38.53,5.08 38.53,5.21 IC3.3 | 38.79,4.83 39.29,4.83 40.18,5.72 40.18,5.97 39.42,6.73 39.04,6.73 IC3.7 39.04,6.86 38.66,7.24 37.77,7.24 | 37.77,7.24 37.52,6.99 37.52,6.86 IC3.10 | 37.26,11.18 36.63,10.54 36.63,8.76 | 37.26,11.18 37.52,11.43 38.02,11.43 C7.1 | 36.63,8.76 36.63,8.38 37.77,7.24 | v38.66,2.29 39.29,1.65 CC19.1 | 38.79,4.83 v38.66,4.7 | 31.93,8.26 34.59,8.26 34.85,8.51 34.98,8.51 35.23,8.76 36.63,8.76 | 31.93,8.26 31.29,8.26 30.4,9.14 30.4,10.29 30.02,10.67 30.02,11.68 J1.1 | 37.26,11.18 v35.86,12.57 | P1.01/2.4B.P$Y2 30.53,22.86 30.53,22.99 30.78,23.24 P1.01/2.4B.P$W1 30.78,23.37 30.78,23.62 v31.55,24.38 | P1.01/2.4B.P$B1 35.36,23.37 v35.36,24 35.36,24.13 35.74,24.51 35.74,24.77 35.48,25.02 35.48,26.04 35.74,26.29 C6.2 35.86,26.29 37.26,24.89 37.77,24.89 C8.1 | R5.2 6.02,25.02 3.61,25.02 2.97,25.65 TP_SDA5.TP 2.97,25.78 2.97,26.16 4.88,28.07 7.8,28.07 8.18,27.69 | IC2.E2 8.31,30.99 8.56,30.99 IC2.E3 8.69,30.99 v8.69,30.1 | v8.94,29.08 8.94,28.45 8.81,28.32 C33.1 8.69,28.19 8.18,27.69 | v7.29,30.73 5.89,29.34 5.89,29.08 R4.2 | v9.7,31.62 11.61,33.53 C25.1 | 8.18,27.69 8.18,26.8 TP_3V3.TP | v32.18,25.02 31.93,25.02 29.51,27.43 v27.36,27.43 | 31.93,8.26 31.93,6.35 31.04,5.46 25.45,5.46 25.2,5.72 24.18,5.72 23.29,6.6 23.29,9.65 22.66,10.29 22.66,11.81 21.89,12.57 21.89,15.75 22.78,16.64 v22.78,17.65
  Bottom 0.127: v28.75,19.3 v28.75,17.27 29.01,17.02 32.69,17.02 33.96,15.75 v35.86,15.75 v35.86,12.57 | v38.66,4.7 v38.66,2.29 | 32.18,24.38 32.69,24.38 33.45,25.15 33.96,25.15 35.1,24 v35.36,24 | 32.18,24.38 v31.55,24.38 | v7.29,30.73 8.05,30.73 8.43,30.35 | 8.43,30.35 v8.69,30.1 8.69,29.34 v8.94,29.08 19.48,18.54 20.24,18.54 21.01,19.3 | 8.43,30.35 v9.7,31.62 | v32.18,25.02 32.18,24.38 | v27.36,27.43 27.36,27.18 22.53,22.35 22.53,20.83 21.01,19.3 | v22.78,17.65 21.13,19.3 21.01,19.3
ALERT  (via drill 0.3)
  Top 0.127: v40.06,11.94 39.93,12.07 38.02,12.07 33.32,16.76 P1.01/2.4B.P$J24 | v7.42,3.56 6.53,4.45 6.53,4.83 U1.5
  Bottom 0.127: v40.06,11.94 40.06,8.51 37.77,6.22 37.77,4.95 36.37,3.56 v7.42,3.56
D+
  Top 0.127: P1.01/2.4B.P$AD6 29.26,21.84 25.7,21.84 24.18,23.37 23.42,23.37 23.16,23.62 23.16,24.51 21.26,26.42 12.5,26.42 11.48,27.43 11.35,27.43 11.23,27.56 11.23,29.34 11.73,29.85 11.99,29.85 D4.4
D-
  Top 0.127: P1.01/2.4B.P$AD4 29.26,22.35 28.37,23.24 28.37,23.37 27.1,24.64 23.42,24.64 21.39,26.67 13.39,26.67 12.12,27.94 D4.6
DN
  Top 0.127: 22.78,27.81 23.16,27.81 23.29,27.94 23.29,28.58 J3.B7 | 22.78,27.81 22.66,27.81 22.53,27.94 22.53,28.58 J3.A7 | 22.78,27.81 21.89,26.92 19.1,26.92 18.08,27.94 14.66,27.94 D4.1
DP  (via drill 0.3)
  Top 0.127: 22.02,29.34 22.02,28.7 J3.B6 | 22.02,29.34 22.15,29.46 22.66,29.46 22.78,29.34 22.78,28.7 J3.A6 | v16.18,29.97 14.66,29.97 D4.3 | 22.02,29.34 v21.77,29.59
  Bottom 0.127: v16.18,29.97 17.45,29.97 17.96,30.48 20.88,30.48 v21.77,29.59
EPD_3V3  (via drill 0.3)
  Top 0.127: L5.2 42.85,28.7 42.09,27.94 42.09,25.4 C1-EP-DR.1 42.09,25.27 42.98,24.38 v42.98,21.34 | v41.2,23.11 40.69,23.62 40.69,24.26 DMG2305UX-7.3 | J2.16 10.72,15.75 10.72,16.13 J2.15 10.72,16.26 11.35,16.26 11.86,16.76 11.86,17.02 11.73,17.15 v11.73,17.4 | v14.91,17.4 17.32,19.81 EPD_C5.2 17.45,19.94 17.96,20.45 v17.96,20.7 | v29.26,31.88 28.37,31.88 27.48,30.99 v27.48,30.86
  Bottom 0.127: v41.2,23.11 v42.98,21.34 42.98,17.78 42.85,17.65 42.85,17.4 43.23,17.02 43.48,17.02 43.87,17.4 43.87,22.35 34.34,31.88 v29.26,31.88 | v11.73,17.4 v14.91,17.4 | v27.48,30.86 25.83,30.86 17.96,22.99 v17.96,20.7
EPD_BUSY  (via drill 0.3)
  Top 0.127: v27.99,20.32 29.26,20.32 P1.01/2.4B.P$AD12 | v14.78,10.67 v17.96,10.67 | v8.56,17.53 v8.56,14.1 | v9.83,18.8 10.21,19.18 10.59,19.18 J2.9
  Bottom 0.127: v27.99,20.32 25.7,18.03 25.32,18.03 v17.96,10.67 | v14.78,10.67 10.72,10.67 10.21,10.16 9.96,10.16 8.56,11.56 v8.56,14.1 | v9.83,18.8 v8.56,17.53
EPD_CS  (1 unrouted)
EPD_DC  (via drill 0.3)
  Top 0.127: v17.96,18.16 19.35,19.56 24.05,19.56 25.32,20.83 29.26,20.83 P1.01/2.4B.P$AD10 | v11.35,18.16 10.72,18.16 J2.11
  Bottom 0.127: v11.35,18.16 v17.96,18.16
EPD_RST  (1 unrouted)
GDR  (via drill 0.3)
  Top 0.127: R2_EP_DR.2 31.8,31.37 31.8,31.88 31.17,32.51 Q2.1 31.04,32.51 29.9,31.37 v28.5,31.37 | v14.02,25.4 11.48,22.86 10.72,22.86 J2.2
  Bottom 0.127: v14.02,25.4 19.99,25.4 25.96,31.37 v28.5,31.37
GND  (via drill 0.3)
  Top 0.127: 17.83,3.94 17.83,2.92 TP_SDA6.TP | 17.83,3.94 17.83,6.6 IC4.B3 | 17.83,3.94 13.51,3.94 SW1.1 13.39,4.06 13.39,5.21 10.59,8 | 10.21,15.11 10.59,15.11 J2.17 | 10.21,15.11 8.05,12.95 8.05,11.05 J2.MP2 8.05,10.92 8.05,9.53 8.94,8.64 EPD_C11.1 9.07,8.51 9.32,8.26 | C4.1 15.16,7.37 15.16,8.38 14.15,9.4 EPD_C10.1 | EPD_C10.1 14.15,9.53 14.15,10.67 C38.2 14.15,10.8 14.15,11.94 | 14.15,11.94 EPD_C9.1 14.15,11.94 | v14.91,12.95 14.53,13.34 EPD_C12.1 | 14.15,11.94 v14.91,11.94 | 10.59,8 10.72,8.13 10.72,8.26 10.97,8.51 C5.1 11.1,8.64 11.35,8.89 13.26,8.89 13.77,9.4 14.02,9.4 EPD_C10.1 | 10.59,8 9.58,8 9.32,8.26 | C2.1 5.13,6.86 6.4,6.86 U1.4 6.53,6.73 6.53,6.48 7.16,5.84 U1.9 | U1.6 7.04,4.95 7.04,5.59 7.16,5.72 U1.9 | U1.9 7.29,5.72 7.92,6.35 7.92,6.73 U1.1 7.92,6.86 9.32,8.26 | C42.1 15.42,33.15 15.42,32.51 C43.2 15.42,32.39 15.42,31.37 16.69,30.1 16.69,29.08 | C42.1 15.42,33.27 15.16,33.53 12.88,33.53 C25.2 12.75,33.53 9.96,30.73 9.83,30.73 | C42.1 15.54,33.27 15.54,33.4 15.8,33.66 17.96,33.66 18.21,33.4 J3.SH2 | R15.1 20.37,27.31 19.48,28.19 19.48,28.58 J3.A12_B1 19.35,28.7 18.72,28.7 18.34,29.08 J3.SH4 18.21,29.08 16.69,29.08 | 16.69,29.08 14.66,29.08 D4.2 | 10.21,19.81 10.59,19.81 J2.8 | 10.21,19.81 8.05,21.97 8.05,24 J2.MP1 8.05,24.13 8.81,24.13 10.59,25.91 C23.1 10.59,26.04 10.59,27.69 10.08,28.19 C33.2 9.96,28.32 9.96,30.61 9.83,30.73 | IC2.B1 7.8,32.13 7.8,31.88 IC2.C1 7.92,31.75 8.18,31.75 IC2.C2 8.31,31.75 8.56,31.75 IC2.C3 8.69,31.75 8.81,31.75 9.83,30.73 | 10.21,15.11 10.21,15.37 9.32,16.26 9.32,18.92 10.21,19.81 | 34.34,18.16 34.09,17.91 34.09,17.27 P1.01/2.4B.P$F23
  Top 0.127: 34.47,21.84 34.72,21.59 35.23,21.59 P1.01/2.4B.P$B7 35.36,21.59 36.25,21.59 38.91,24.26 38.91,24.77 C8.2 | 33.07,18.29 32.05,18.29 P1.01/2.4B.P$86 | 33.07,18.29 P1.01/2.4B.P$82 | 33.07,18.29 P1.01/2.4B.P$74 | 34.34,18.16 P1.01/2.4B.P$78 | 34.34,18.16 P1.01/2.4B.P$74 | P1.01/2.4B.P$85 32.05,19.43 32.69,19.43 P1.01/2.4B.P$74 | P1.01/2.4B.P$84 32.05,20.57 32.56,20.07 P1.01/2.4B.P$74 | 31.93,21.84 30.78,21.84 | 31.93,21.84 P1.01/2.4B.P$83 | 31.93,21.84 P1.01/2.4B.P$74 | P1.01/2.4B.P$81 33.2,19.43 P1.01/2.4B.P$74 | P1.01/2.4B.P$80 33.2,20.7 P1.01/2.4B.P$74 | P1.01/2.4B.P$77 34.34,19.43 33.71,18.8 P1.01/2.4B.P$74 | 33.83,21.21 34.34,20.7 P1.01/2.4B.P$76 | 33.83,21.21 33.2,21.84 P1.01/2.4B.P$79 | 33.83,21.21 P1.01/2.4B.P$74 | 34.47,21.84 P1.01/2.4B.P$75 | 34.47,21.84 P1.01/2.4B.P$74 | C18.2 26.34,13.97 25.2,12.83 C21.2 25.07,12.7 23.29,12.7 | 23.29,12.7 23.29,13.34 CC5.1 | 23.29,12.7 v23.29,12.19 23.29,10.67 C17.2 | 24.56,4.19 24.43,4.06 SW2.1 24.56,4.19 | 24.56,4.19 24.94,4.57 24.94,4.83 C11.1 | J1.5 32.44,11.68 31.29,11.68 J1.3 31.17,11.68 v30.66,11.18 | 17.7,8.51 17.7,9.02 17.58,9.14 C3.1 | 17.7,8.51 17.7,7.75 IC4.B1 | v18.34,8.51 17.7,8.51 | 24.56,4.19 23.55,5.21 21.13,5.21 19.74,6.6 v19.74,8.38 | P1.01/2.4B.P$90 30.78,18.29 30.78,19.43 P1.01/2.4B.P$89 | 30.78,21.84 30.78,20.7 P1.01/2.4B.P$88 | 30.78,21.84 P1.01/2.4B.P$87 | 35.48,4.83 35.48,4.06 SW3.1 35.48,3.94 35.61,3.81 36.12,3.81 37.13,2.79 39.29,2.79 40.44,1.65 CC19.2 | 35.48,4.83 35.48,5.46 C10.1 | IC3.9 38.02,6.86 38.4,6.86 IC3.8 38.4,6.73 v38.4,6.22 | 40.82,10.67 40.82,6.86 | 40.82,6.86 40.82,5.84 | 40.82,10.67 41.58,11.43 C22.1 | 40.82,6.86 v40.06,6.86
  Top 0.127: 40.82,10.67 40.18,11.3 | 40.18,11.3 40.06,11.43 39.42,11.43 C7.2 | 40.06,13.97 40.06,12.83 CC14.1 40.06,12.7 40.56,12.19 40.56,11.68 40.18,11.3 | 40.06,13.97 41.58,13.97 CC4.1 | 40.06,13.97 CC1.2 39.93,14.1 39.93,15.88 X1.2 | X1.2 39.93,16 41.83,16 CC2.2 41.96,16 42.6,16.64 42.6,17.53 42.47,17.65 42.47,18.92 42.6,19.05 43.48,19.05 43.74,19.3 43.74,20.83 | 43.74,20.83 43.74,21.21 43.36,21.59 43.36,25.27 C1-EP-DR.2 | X1.4 38.53,17.02 38.79,17.02 39.8,16 X1.2 | 35.48,4.83 36.37,4.83 37.77,3.43 39.67,3.43 41.2,4.95 41.2,5.46 40.82,5.84 | 40.82,5.84 R8.2 | C24.1 16.69,24.51 15.29,24.51 14.66,23.88 EPD_C2.1 14.66,23.75 14.66,22.99 15.04,22.61 EPD_C1.1 15.16,22.48 15.16,22.23 16.05,21.34 EPD_C6.1 | EPD_C8.1 12.88,16 14.15,16 C37.2 14.27,16.13 14.27,18.03 16.05,19.81 EPD_C5.1 16.18,19.94 16.18,20.7 | 16.18,20.7 16.18,21.21 EPD_C6.1 | 16.18,20.7 14.4,20.7 14.02,21.08 13.51,21.08 EPD_C7.1 | EPD_C6.1 16.18,21.34 17.58,22.73 18.85,22.73 TP_SDA10.TP 18.97,22.86 20.12,22.86 v20.37,23.11 | C8.2 38.91,24.89 38.02,25.78 37.52,25.78 37.01,26.29 C6.1 36.88,26.42 36.88,28.58 36.5,28.96 | 35.23,29.72 35.23,31.12 35.36,31.24 35.36,32.13 R_TYPE_SEL.1 | 35.23,29.72 36.12,28.83 SJ1.1 | 36.5,28.96 37.26,29.72 37.26,33.02 D2.1 | 36.5,28.96 36.25,28.96 SJ1.1 | 36.5,28.96 SJ1.1 | 31.04,29.85 31.29,30.1 31.29,31.24 R2_EP_DR.1 | 31.04,29.85 30.02,29.85 29.77,30.1 | 29.77,30.1 29.51,30.35 CC3.1 29.77,30.1 | 32.56,28.32 32.56,27.43 C12.2 | 31.04,29.85 32.56,28.32 | IC1.D2 18.08,14.73 18.08,16.26 R9.1 18.21,16.38 19.1,17.27 19.99,17.27 C39.2 | C13.2 22.02,17.15 21.01,17.15 20.88,17.27 20.12,17.27 C39.2
  Top 0.127: 22.66,21.21 22.66,20.45 CC10.2 | 22.66,21.21 23.29,21.84 C15.2 | 21.77,22.1 21.26,22.1 C16.2 | 22.66,21.21 21.77,22.1 | 25.2,26.8 25.7,26.8 C20.1 25.83,26.8 25.83,28.58 J3.A1_B12 25.96,28.7 26.34,29.08 26.97,29.08 J3.SH3 | 25.2,26.8 24.31,26.8 R14.2 | 25.2,26.8 25.2,25.4 CC11.2 | 28.63,28.96 27.23,28.96 27.1,29.08 J3.SH3 | v22.02,22.35 21.77,22.1 | J3.SH1 26.97,33.27 26.97,29.21 J3.SH3 | v20.12,19.05 20.12,17.4 C39.2 | 28.63,28.96 29.77,30.1 | 28.63,28.96 C9.2 | 35.23,29.72 34.72,29.72 33.32,28.32 32.56,28.32 | 43.74,20.83 42.85,20.83 42.47,21.21 42.47,22.99 42.72,23.24 42.72,23.5 41.2,25.02 39.17,25.02 39.04,24.89 C8.2
  Bottom 0.127: v14.91,11.94 v14.91,12.95 | 19.61,8.51 v18.34,8.51 | 25.45,14.35 25.7,14.61 25.7,17.02 28.5,19.81 30.4,19.81 | 25.45,14.35 v23.29,12.19 19.61,8.51 | 30.4,19.81 30.66,19.56 P1.01/2.4B.P$89 | v30.66,11.18 29.39,11.18 29.13,11.43 28.37,11.43 25.45,14.35 | 19.61,8.51 v19.74,8.38 | 30.4,19.81 30.66,20.07 30.66,20.57 P1.01/2.4B.P$88 | v38.4,6.22 39.42,6.22 v40.06,6.86 | 22.02,23.11 22.02,24.13 26.97,29.08 J3.SH3 | 22.02,23.11 v22.02,22.35 20.12,20.45 v20.12,19.05 | 22.02,23.11 v20.37,23.11 | J3.SH2 18.34,33.4 26.97,33.4 J3.SH1
  pour Top: -3.22,-1.12 48.03,-1.12 48.03,36.93 -3.22,36.73
  pour Bottom: -3.72,-1.42 48.73,-1.42 48.73,37.43 -3.72,36.93
HAPTIC_EN  (via drill 0.3)
  Top 0.127: v29.01,25.4 31.17,25.4 32.05,24.51 32.05,24.13 31.29,23.37 P1.01/2.4B.P$U1 | v24.31,18.03 24.31,16.64 22.4,14.73 v22.4,12.7 | v18.72,9.02 18.72,8.76 18.85,8.64 18.85,8.26 18.34,7.75 IC4.A1
  Bottom 0.127: v29.01,25.4 29.01,25.15 27.23,23.37 27.23,21.84 25.32,19.94 25.32,19.05 v24.31,18.03 | v18.72,9.02 v22.4,12.7
IMU_INT1  (via drill 0.3)
  Top 0.127: v33.58,24.64 32.31,23.37 P1.01/2.4B.P$N1 | v41.58,17.91 v40.69,18.8 | v39.67,5.84 39.04,5.84 IC3.5
  Bottom 0.127: v33.58,24.64 34.09,24.64 36.12,22.61 38.66,22.61 40.69,20.57 v40.69,18.8 | v41.58,17.91 41.58,15.24 41.96,14.86 41.96,8.13 v39.67,5.84
IMU_INT2  (1 unrouted)
LX1
  Top 0.127: IC2.B2 8.31,32.13 8.56,32.13 IC2.B3 8.69,32.26 8.81,32.26 8.94,32.39 8.94,32.77 8.69,33.02 6.78,33.02 5.26,31.5 2.97,31.5 2.84,31.37 L1.1
LX2
  Top 0.127: IC2.D2 8.31,31.37 8.56,31.37 IC2.D3 8.69,31.37 8.81,31.37 9.19,30.99 9.19,29.97 7.8,28.58 3.48,28.58 2.84,29.21 L1.2
MOSI  (1 unrouted)
N$1
  Top 0.127: IC1.D1 18.47,14.73 18.47,16 18.72,16.26 R9.2
N$2  (via drill 0.3)
  Top 0.127: v37.26,11.81 32.31,16.76 P1.01/2.4B.P$N24 | v38.79,10.8 v37.52,10.8 | v41.45,14.73 41.71,14.73 43.36,16.38 v43.36,17.53 | v30.66,29.34 30.4,29.34 30.02,28.96 C9.1
  Bottom 0.127: v37.26,11.81 37.26,11.05 v37.52,10.8 | v38.79,10.8 38.79,12.07 v41.45,14.73 | v43.36,17.53 43.36,21.08 43.48,21.21 43.48,21.46 34.98,29.97 34.98,30.23 34.59,30.61 31.93,30.61 v30.66,29.34
N$3  (via drill 0.3)
  Top 0.127: v37.39,16.26 34.34,16.26 33.58,17.02 33.58,17.27 P1.01/2.4B.P$H23 | v40.06,18.92 40.82,19.69 42.21,19.69 | LL1.1 42.21,19.69 | v30.66,31.24 30.66,30.48 CC3.2 | 42.21,19.69 v42.21,23.37
  Bottom 0.127: v40.06,18.92 v37.39,16.26 | v30.66,31.24 34.34,31.24 v42.21,23.37
N$4
  Top 0.127: IC2.D1 7.8,31.37 5.77,31.37 5.51,31.12 R2.2
N$5
  Top 0.127: IC2.E1 7.8,30.99 7.8,29.21 R3.2
N$6
  Top 0.127: P1.01/2.4B.P$AC5 29.77,22.1 29.77,23.5 29.9,23.62 29.9,23.88 27.1,26.67 C20.2
N$7
  Top 0.127: LL1.2 43.1,18.42 43.87,17.65 43.87,15.11 42.85,14.1 CC4.2 42.85,13.97 42.85,11.56 C22.2 42.72,11.43 42.09,10.8 42.09,8.89 ANT1.1
N$8
  Top 0.127: P1.01/2.4B.P$B24 35.36,16.76 37.52,16.76 38.4,15.88 X1.1 38.53,15.88 38.79,15.62 38.79,14.1 CC1.1
N$9
  Top 0.127: P1.01/2.4B.P$A23 35.86,17.27 37.39,17.27 37.9,17.78 39.17,17.78 39.8,17.15 X1.3 39.93,17.15 CC2.1
N$10  (via drill 0.3)
  Top 0.127: v35.36,18.03 35.36,17.65 34.98,17.27 34.59,17.27 P1.01/2.4B.P$D23 | v29.39,23.75 27.86,25.27 26.47,25.27 CC11.1
  Bottom 0.127: v35.36,18.03 35.36,21.84 33.58,23.62 29.51,23.62 v29.39,23.75
N$11  (via drill 0.3)
  Top 0.127: v34.34,25.4 34.34,24.38 34.21,24.26 34.21,23.24 34.09,23.11 34.09,22.86 P1.01/2.4B.P$F2 | v26.85,20.19 26.85,16.89 25.83,15.88 X2.1 25.7,15.88 25.2,15.37 25.2,14.1 C18.1
  Bottom 0.127: v34.34,25.4 34.34,26.42 33.58,27.18 33.32,27.18 30.4,24.26 29.26,24.26 28.63,23.62 28.63,21.97 v26.85,20.19
N$12  (via drill 0.3)
  Top 0.127: v36.25,18.54 36.25,18.16 35.86,17.78 P1.01/2.4B.P$A22 | v33.45,26.67 33.45,26.92 33.83,27.31 C12.1
  Bottom 0.127: v36.25,18.54 36.25,21.34 33.71,23.88 31.42,23.88 31.04,24.26 31.04,24.51 33.2,26.67 v33.45,26.67
N$13  (via drill 0.3)
  Top 0.127: v39.29,23.11 39.04,22.86 39.04,21.97 35.86,18.8 P1.01/2.4B.P$A18 | v24.31,18.8 23.93,18.8 23.42,18.29 22.15,18.29 C13.1
  Bottom 0.127: v39.29,23.11 38.91,23.11 34.34,27.69 31.17,27.69 29.39,25.91 28.5,25.91 24.31,21.72 v24.31,18.8
N$14
  Top 0.127: LL2.1 26.09,22.61 25.32,22.61 23.8,24.13 LL3.2
N$15  (via drill 0.3)
  Top 0.127: v35.99,25.15 35.99,23.5 35.36,22.86 35.36,22.61 P1.01/2.4B.P$B3 | v27.86,23.24 27.23,22.61 LL2.2
  Bottom 0.127: v35.99,25.15 33.71,27.43 31.67,27.43 27.86,23.62 v27.86,23.24
N$17  (via drill 0.3)
  Top 0.127: CC10.1 23.8,20.45 23.8,21.21 24.43,21.84 C15.1 24.43,21.97 22.66,23.75 22.66,24 LL3.1 22.53,24 21.89,23.37 21.26,23.37 C16.1 21.13,23.24 17.96,20.07 17.96,18.8 14.66,15.49 13.77,15.49 13.64,15.37 13.64,14.48 14.15,13.97 14.53,13.97 v14.91,13.59 | v34.85,16.76 34.34,16.76 P1.01/2.4B.P$E24 | v36.12,22.1 35.36,22.1 P1.01/2.4B.P$B5 | v37.52,10.16 v37.52,8.13
  Bottom 0.127: 35.74,16.76 v34.85,16.76 | 35.74,16.76 39.8,20.83 39.8,21.08 38.79,22.1 v36.12,22.1 | v14.91,13.59 9.7,13.59 8.69,14.61 8.43,14.61 7.42,13.59 7.42,8.89 12.5,3.81 36.25,3.81 37.52,5.08 v37.52,8.13 | v37.52,10.16 36.37,11.3 36.37,16.13 35.74,16.76
N$18  (via drill 0.3)
  Top 0.127: v32.05,26.54 32.44,26.16 34.21,26.16 34.85,25.53 34.85,25.27 34.59,25.02 34.59,24.26 34.47,24.13 34.47,23.11 34.59,22.99 34.59,22.86 P1.01/2.4B.P$D2 | v25.83,19.81 25.83,18.54 X2.2 25.7,18.42 25.45,18.16 v25.45,17.53 | v22.15,11.68 22.15,10.67 C17.1
  Bottom 0.127: v32.05,26.54 31.17,26.54 28.37,23.75 28.37,22.35 v25.83,19.81 | v22.15,11.68 25.45,14.99 v25.45,17.53
N$19
  Top 0.127: R8.1 40.69,5.21 40.06,5.21 38.91,4.06 37.9,4.06 37.52,4.45 37.52,5.21 IC3.1
N$20  (via drill 0.3)
  Top 0.127: v35.23,24.64 34.85,24.26 34.85,23.37 P1.01/2.4B.P$C1 | v26.21,16.89 24.94,16.89 23.42,15.37 23.42,14.73 CC5.2
  Bottom 0.127: v35.23,24.64 37.01,24.64 41.2,20.45 41.2,18.54 38.02,15.37 38.02,10.03 35.1,7.11 34.85,7.11 33.45,8.51 33.45,10.41 30.53,13.34 28.12,13.34 26.21,15.24 v26.21,16.89
N$21  (via drill 0.3)
  Top 0.127: v43.87,29.85 44.12,29.59 44.12,29.21 C2-EP-DR.1 | D2.2 40.69,33.02 v41.45,32.26 43.23,32.26 45.14,30.35 45.14,27.69 44.12,26.67 44.12,7.49 39.8,3.18 37.64,3.18 36.5,4.32 v36.12,4.32 | v22.78,6.99 22.78,8.38 21.89,9.27 21.77,9.27 19.74,11.3 D1.1
  Bottom 0.127: v41.45,32.26 v43.87,29.85 | v22.78,6.99 26.85,6.99 29.51,4.32 v36.12,4.32
N$22
  Top 0.127: R1_EP_DR.2 35.61,34.54 31.8,34.54 31.17,33.91 Q2.2
N$23
  Top 0.127: SJ1.2 36.12,30.48 36.12,32.13 R_TYPE_SEL.2 36.12,32.26 35.74,32.64 35.74,34.04 R1_EP_DR.1
N$24  (via drill 0.3)
  Top 0.127: Q2.3 29.01,33.27 33.45,33.27 33.58,33.4 D3.2 33.71,33.4 v34.85,32.26 | C2-EP-DR.2 44.25,27.81 44.25,28.07 44.88,28.7 44.88,30.23 43.48,31.62 41.2,31.62 38.4,28.83 L5.1 38.28,28.83 37.77,29.34 v37.52,29.34
  Bottom 0.127: v34.85,32.26 34.85,32 v37.52,29.34
N$25
  Top 0.127: J2.4 10.72,21.84 11.48,21.84 13.39,23.75 EPD_C2.2
N$26
  Top 0.127: J2.5 10.72,21.34 11.35,21.34 12.5,22.48 13.77,22.48 EPD_C1.2
N$27
  Top 0.127: R15.2 21.64,27.31 21.64,27.43 21.26,27.81 21.13,27.81 21.01,27.94 21.01,28.58 J3.B5
N$28
  Top 0.127: J2.19 10.72,14.35 11.23,14.35 12.24,15.37 12.24,21.08 EPD_C7.2
N$29
  Top 0.127: R11.1 16.56,4.45 15.8,4.45 11.73,8.51 C5.2
N$30
  Top 0.127: J2.24 10.72,11.81 11.35,11.81 12.88,13.34 EPD_C12.2
N$31  (via drill 0.3)
  Top 0.127: v11.35,15.11 11.1,14.86 10.72,14.86 J2.18 | v14.15,21.59 14.53,21.59 14.78,21.34 EPD_C6.2
  Bottom 0.127: v11.35,15.11 11.35,16.26 10.85,16.76 10.85,18.29 v14.15,21.59
N$32
  Top 0.127: J2.20 10.72,13.84 11.86,13.84 12.75,14.73 EPD_C8.2
N$33
  Top 0.127: C10.2 34.98,5.46 33.71,5.46 33.45,5.21 33.07,5.21 32.69,5.59 R12.1
N$34
  Top 0.127: J2.22 10.59,12.7 9.7,12.7 9.32,12.32 9.32,12.07 11.86,9.53 12.75,9.53 EPD_C10.2
N$35
  Top 0.127: C11.2 25.58,4.95 25.07,5.46 22.02,5.46 21.89,5.59 R13.1
N$36
  Top 0.127: R14.1 23.67,26.92 23.67,27.81 23.8,27.94 23.8,28.58 J3.A5
N$37
  Top 0.127: IC4.A2 18.34,7.24 19.23,8.13 19.23,9.14 18.85,9.53 18.34,9.53 18.08,9.27 C3.2
OUT+
  Top 0.127: IC4.A3 18.34,6.6 18.34,5.46 19.74,4.06 TP_SDA7.TP
OUT-
  Top 0.127: IC4.C3 17.2,6.73 16.43,7.49 16.43,8.76 17.45,9.78 19.61,9.78 21.13,8.26 TP_SDA8.TP
P0.13  (via drill 0.3)
  Top 0.127: v25.7,21.34 29.26,21.34 P1.01/2.4B.P$AD8 | v26.47,23.24 26.47,23.75 v26.09,24.13 | v25.96,30.35 22.78,30.35 18.59,34.54 6.65,34.54 v6.27,34.16 | v7.92,13.46 v7.92,18.16 | v11.1,6.48 11.61,5.97 11.61,5.33 10.72,4.45 10.72,4.06 SW1.2
  Bottom 0.127: v25.7,21.34 25.7,22.48 v26.47,23.24 | v26.09,24.13 26.09,25.15 28.75,27.81 28.75,29.08 27.48,30.35 27.36,30.35 27.23,30.48 26.09,30.48 v25.96,30.35 | v6.27,34.16 5.51,33.4 5.51,26.8 7.92,24.38 v7.92,18.16 | v7.92,13.46 7.92,9.65 v11.1,6.48
P0.14  (1 unrouted)
P1.01  (via drill 0.3)
  Top 0.127: v29.77,17.53 30.02,17.27 30.53,17.27 P1.01/2.4B.P$Y23 | 40.18,21.84 40.31,21.97 R_PWR_EPD.1 | 40.18,21.84 v39.29,20.96 | 40.18,21.84 39.8,22.23 DMG2305UX-7.1
  Bottom 0.127: v29.77,17.53 35.86,17.53 v39.29,20.96
P1.02  (via drill 0.3)
  Top 0.127: v30.91,16.26 30.91,16.76 P1.01/2.4B.P$W24 | v34.98,7.62 33.96,7.62 32.31,5.97 32.31,4.32 32.56,4.06 SW3.2
  Bottom 0.127: v30.91,16.26 31.29,16.26 31.42,16.38 32.56,16.38 34.85,14.1 34.85,7.75 v34.98,7.62
PMIC_INT  (via drill 0.3)
  Top 0.127: v18.97,13.46 18.47,13.46 IC1.A1 | v31.04,22.86 31.55,22.86 P1.01/2.4B.P$T2
  Bottom 0.127: v18.97,13.46 20.37,13.46 26.59,19.69 26.97,19.69 27.48,20.19 27.48,20.45 29.9,22.86 v31.04,22.86
PREVGH  (via drill 0.3)
  Top 0.127: J2.21 10.72,13.34 11.86,13.34 12.5,13.97 13.39,13.97 13.51,13.84 13.51,12.83 12.88,12.19 EPD_C9.2 12.88,12.07 12.12,11.3 v12.12,10.16 | v34.47,30.1 33.71,30.1 D3.1 | v42.72,14.99 42.21,14.48 42.21,13.59 v41.07,12.45 | v26.21,4.95 v29.51,4.95
  Bottom 0.127: v34.47,30.1 34.47,29.85 40.69,23.62 40.69,22.73 42.6,20.83 42.6,15.11 v42.72,14.99 | v41.07,12.45 39.93,12.45 39.29,11.81 39.29,10.54 33.71,4.95 v29.51,4.95 | v26.21,4.95 17.32,4.95 v12.12,10.16
PREVGL  (via drill 0.3)
  Top 0.127: v10.08,10.67 10.08,8.64 EPD_C11.2 | v9.83,12.19 10.59,12.19 J2.23 | v14.78,11.3 16.05,11.3 D1.2
  Bottom 0.127: 10.08,11.3 10.08,11.94 v9.83,12.19 | 10.08,11.3 v10.08,10.67 | 10.08,11.3 v14.78,11.3
RESET  (1 unrouted)
  Top 0.127: J1.6 32.56,12.95 33.07,12.95 33.83,12.19 34.09,12.19 34.72,11.56 34.72,10.03 34.34,9.65 TP_SDA4.TP
SCK  (via drill 0.3)
  Top 0.127: v39.55,24.13 39.55,24 35.86,20.32 P1.01/2.4B.P$A12 | v30.66,28.19 30.4,28.19 30.28,28.32 28.63,28.32 v28.24,27.94 | v11.35,16.89 11.1,17.15 10.72,17.15 J2.13
  Bottom 0.127: v39.55,24.13 39.29,24.13 35.23,28.19 v30.66,28.19 | v28.24,27.94 28.24,27.69 23.8,23.24 23.8,17.65 21.77,15.62 12.62,15.62 v11.35,16.89
SCL/1.4C  (via drill 0.3)
  Top 0.127: v16.94,8.64 17.45,8.13 17.45,7.87 17.32,7.75 IC4.C1 | v14.91,9.27 v16.31,9.27 | v13.26,7.62 v14.27,8.64 | v11.1,5.84 9.83,5.84 8.18,4.19 7.8,4.19 7.54,4.45 7.54,4.83 U1.7
  Bottom 0.127: v16.31,9.27 v16.94,8.64 | v14.27,8.64 v14.91,9.27 | v13.26,7.62 12.88,7.62 v11.1,5.84
SCL/2.4C  (via drill 0.3)  (1 unrouted)
  Top 0.127: v18.97,14.1 18.85,13.97 18.47,13.97 IC1.B1 | 4.88,29.08 5.26,29.08 R4.1 | 4.88,29.08 4.88,30.23 | 4.88,30.23 4.88,30.99 R2.1 | 4.88,29.08 v4.75,29.08 | v33.83,5.97 35.74,5.97 35.86,5.84 37.39,5.84 IC3.12 | 4.88,30.23 1.7,30.23 1.45,29.97 1.45,27.43 TP_SCL.TP
  Bottom 0.127: 15.54,14.1 11.35,14.1 7.42,18.03 7.42,24.51 4.75,27.18 v4.75,29.08 | 15.54,14.1 v18.97,14.1 | v33.83,5.97 33.58,5.97 33.32,5.72 28.5,5.72 26.72,7.49 22.66,7.49 21.39,6.22 16.43,6.22 15.54,7.11 15.54,14.1
SDA/1.4C  (1 unrouted)
SDA/2.4C  (via drill 0.3)
  Top 0.127: v19.23,16.76 19.23,15.11 18.47,14.35 IC1.C1 | v8.05,24.89 6.65,24.89 R5.1 6.65,25.02 5.38,26.29 5.38,26.67 TP_SDA.TP | v30.15,27.81 32.05,25.91 32.94,25.91 34.09,24.77 34.09,24.51 33.71,24.13 33.58,24.13 32.82,23.37 P1.01/2.4B.P$L1 | v38.02,4.57 38.02,5.21 IC3.2 | v6.4,29.21 7.16,29.21 R3.1
  Bottom 0.127: v19.23,16.76 19.23,17.53 11.86,24.89 v8.05,24.89 5.77,27.18 5.77,29.21 | 5.77,29.21 5.77,33.27 6.15,33.66 14.66,33.66 16.18,32.13 28.37,32.13 30.15,30.35 v30.15,27.81 30.28,27.69 30.78,27.69 31.04,27.94 35.1,27.94 42.21,20.83 42.21,7.75 39.8,5.33 38.66,5.33 38.02,4.7 v38.02,4.57 | 5.77,29.21 v6.4,29.21
SWDCLK
  Top 0.127: 30.4,13.84 30.4,16.76 P1.01/2.4B.P$AA24 | 30.4,13.84 31.17,13.08 J1.4 | 30.4,13.84 30.02,13.84 29.51,13.34 28.5,13.34 27.23,12.07 27.23,9.14 28.12,8.26 29.77,8.26 30.53,7.49 30.53,6.86 TP_SDA3.TP
SWDIO  (via drill 0.3)
  Top 0.127: v29.9,16.13 29.9,16.76 P1.01/2.4B.P$AC24 | v33.07,12.32 30.66,12.32 30.02,12.95 J1.2 | v29.64,7.75 28.88,6.99 28.24,6.99 TP_SDA2.TP | v33.45,7.75 33.71,7.75 33.96,8 34.72,8 34.98,8.26 v35.36,8.26
  Bottom 0.127: v33.07,12.32 32.31,12.32 30.4,14.22 30.4,15.37 29.9,15.88 v29.9,16.13 30.53,16.76 32.56,16.76 35.36,13.97 v35.36,8.26 | v33.45,7.75 v29.64,7.75
SWO
  Top 0.127: P1.01/2.4B.P$AD22 29.26,17.78 28.63,17.78 26.97,16.13 26.97,9.4 24.69,7.11 TP_SDA1.TP
VBAT/1.2A
  Top 0.127: U1.2 7.42,6.86 7.04,6.86 U1.3 6.91,6.86 6.91,7.24 6.65,7.49 4.75,7.49 4.24,6.99 | 4.24,6.99 2.97,8.26 TP_SDA9.TP | 4.24,6.99 4.75,6.48 5,6.48 C2.2
VBAT/2.5C
  Top 0.127: IC1.C2 17.96,14.35 14.78,14.35 14.27,14.86 C37.1
VBUS/1.5D  (via drill 0.3)
  Top 0.127: C42.2 16.05,33.15 16.69,32.51 C43.1 | 20.5,29.85 19.99,30.35 19.86,30.35 17.83,32.39 16.69,32.39 C43.1 | 20.5,29.85 20.5,28.83 20.37,28.7 J3.A9_B4 | 20.5,29.85 20.75,30.1 23.93,30.1 24.94,29.08 24.94,28.7 J3.A4_B9 | v13.26,29.08 12.12,29.08 D4.5 | v15.93,31.75 16.56,32.39 C43.1
  Bottom 0.127: v15.93,31.75 v13.26,29.08
VBUS/2.6D  (via drill 0.3)
  Top 0.127: v17.32,13.46 17.45,13.59 17.96,13.59 IC1.A2 | C38.1 12.88,10.8 13.51,11.43 13.51,12.45 13.77,12.7 14.53,12.7 14.78,12.45 15.04,12.45 v16.05,13.46 16.81,12.7 19.23,12.7 19.48,12.95 | v27.86,24.64 29.26,23.24 29.26,22.86 P1.01/2.4B.P$AD2 | v24.82,19.69 24.56,19.69 23.93,19.05 23.55,19.05 v23.29,18.8 | v21.64,16.13 21.64,15.11 19.48,12.95 | v24.05,10.54 26.21,12.7 C21.1 | v21.89,9.78 20.5,11.18 20.5,11.94 19.48,12.95
  Bottom 0.127: v16.05,13.46 v17.32,13.46 | v27.86,24.64 27.86,24.38 26.97,23.5 26.97,21.97 24.82,19.81 v24.82,19.69 | v23.29,18.8 23.29,17.53 21.89,16.13 v21.64,16.13 | v24.05,10.54 22.66,10.54 v21.89,9.78
VREG  (via drill 0.3)
  Top 0.127: 12.24,25.91 16.43,25.91 17.32,25.02 17.32,24 16.81,23.5 C24.2 | 12.24,25.91 11.99,25.91 C23.2 12.24,25.91 | IC1.B2 17.96,13.97 17.2,13.97 16.81,13.59 16.81,13.34 17.2,12.95 19.1,12.95 19.99,13.84 19.99,16.13 C39.1 20.12,16.26 20.62,16.76 v20.75,16.76 | IC2.A3 8.56,32.64 8.31,32.64 IC2.A2 8.18,32.64 7.8,32.64 IC2.A1 7.8,32.51 v6.91,32.51 | v6.27,33.15 4.75,33.15 TP_VREG.TP | v12.24,25.15 12.24,25.91
  Bottom 0.127: v6.27,33.15 6.78,32.64 | 12.24,25.27 8.94,28.58 8.81,28.58 6.78,30.61 6.78,32.64 | 12.24,25.27 v20.75,16.76 | 6.78,32.64 v6.91,32.51 | 12.24,25.27 v12.24,25.15
(copper drawn outside any net)
  shapes: Top area x2